# Altium PCB MAGI'sCore-bak.PcbDoc
Units mil, origin at the board's own origin, x right, y up, seen from the top; angles counter-clockwise.
Board outline 6000 x 4000 mil, 2 copper layers (Top Layer, Bottom Layer); 13 components, 31 nets, 79 pads, 12 vias.
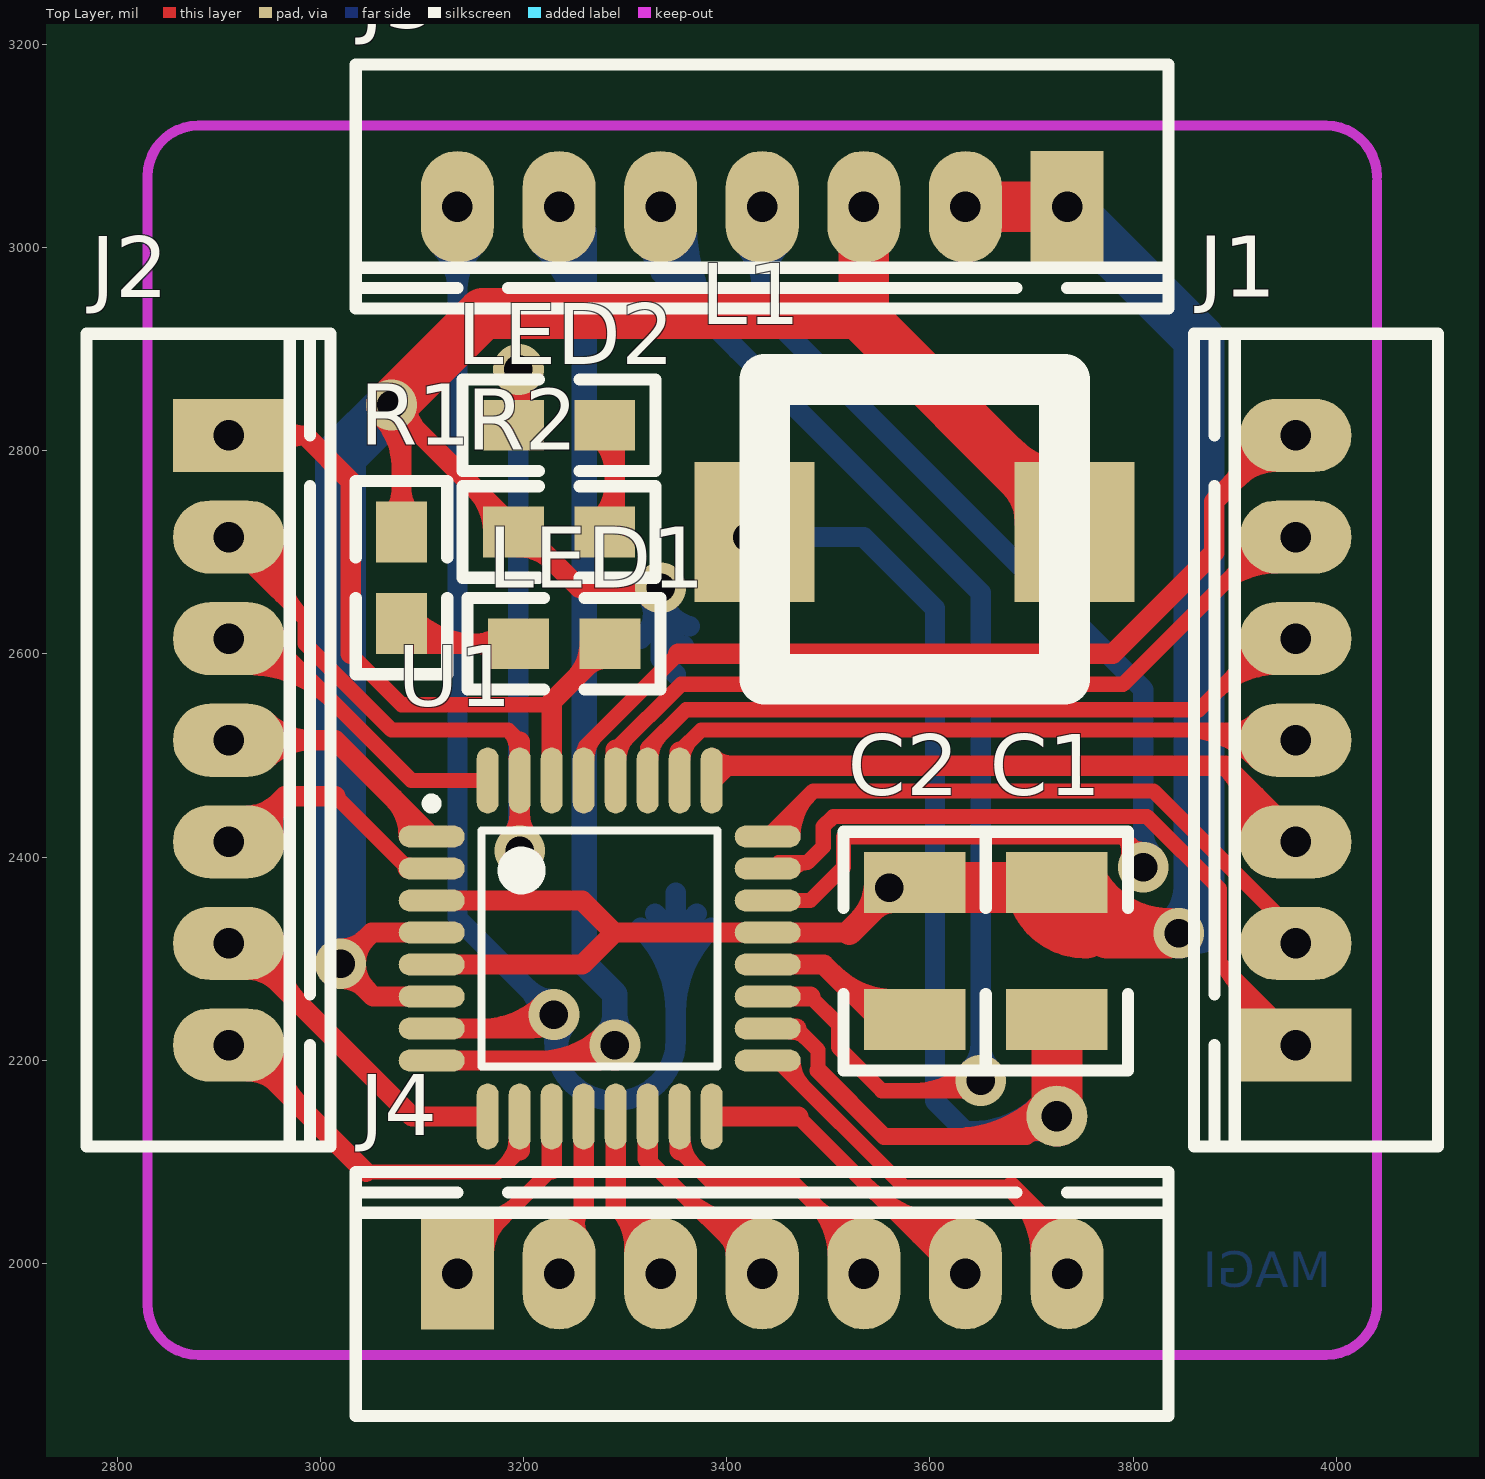
[diagram p0: Top Layer view]
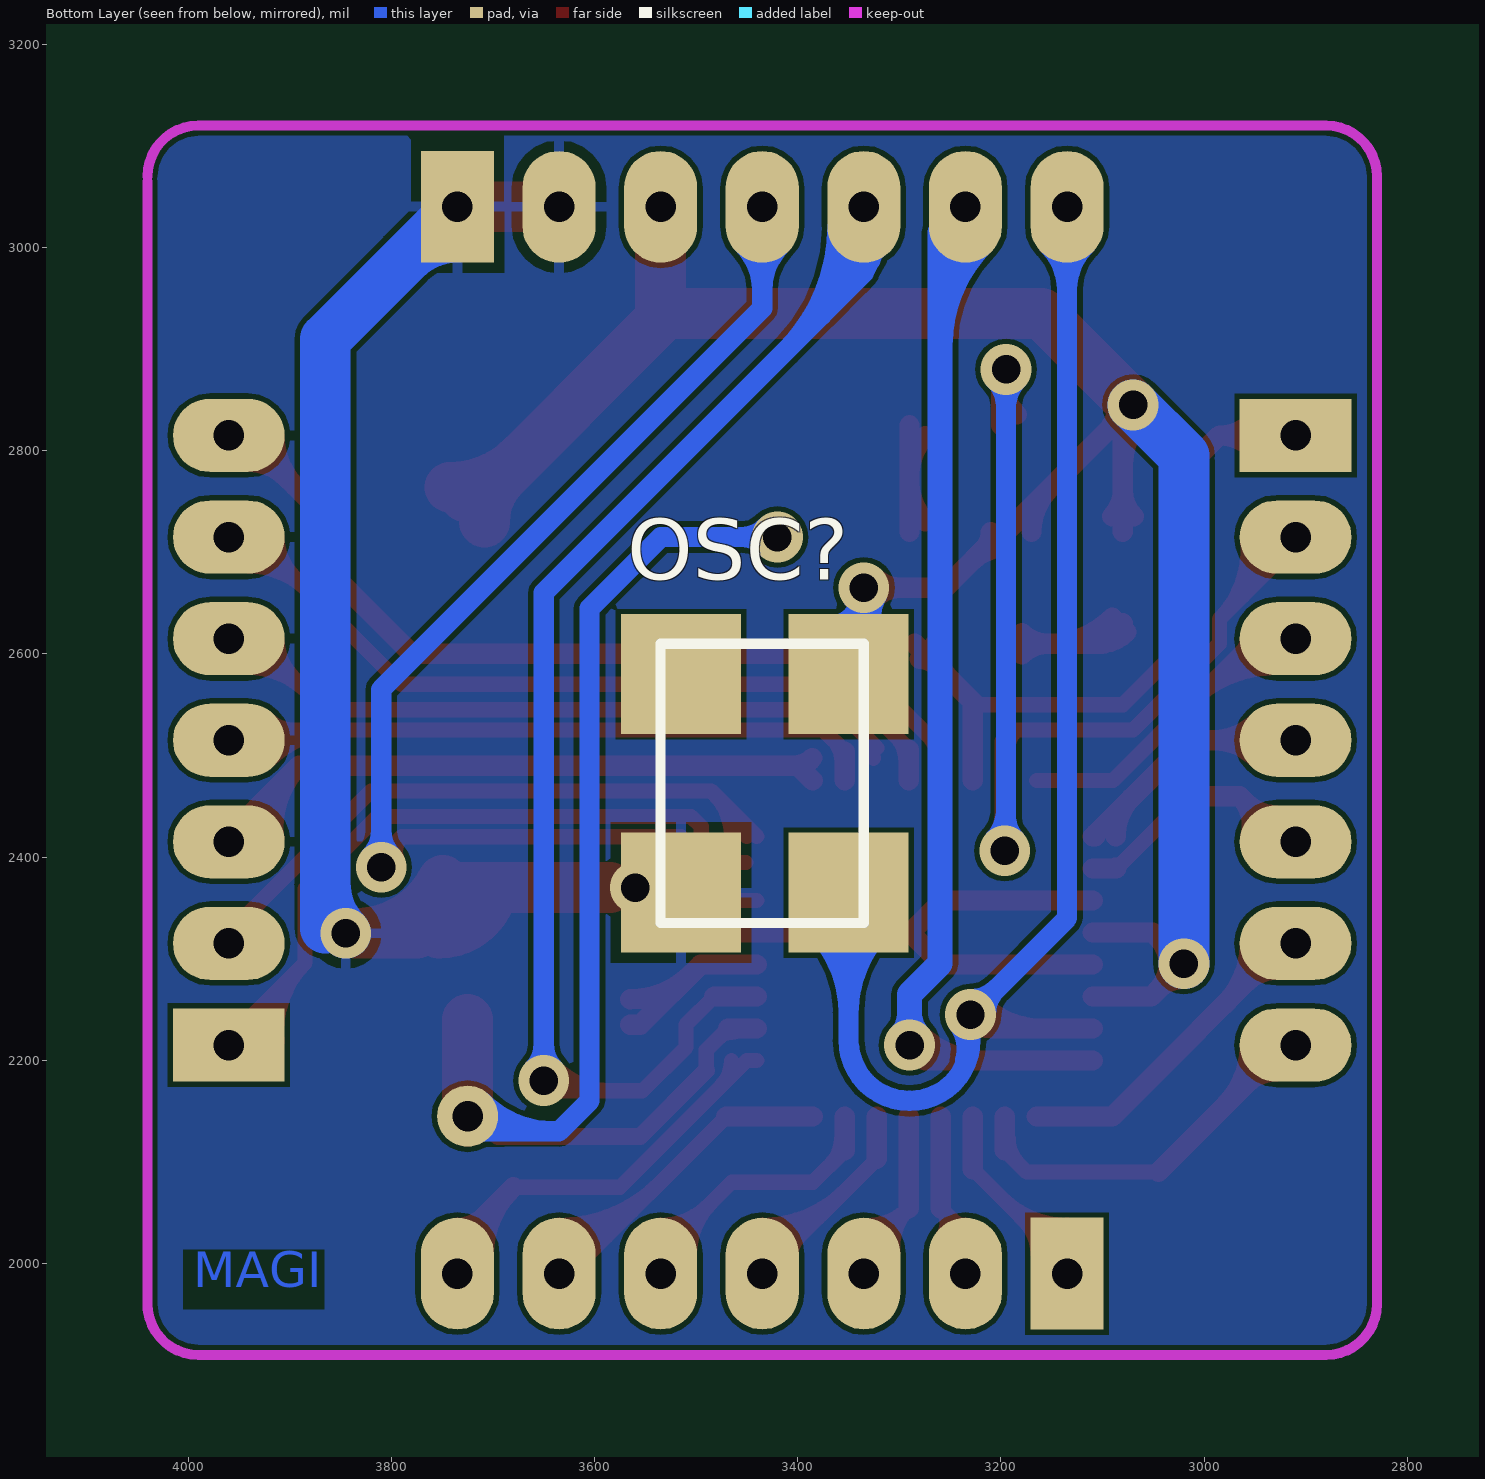
[diagram p1: Bottom Layer view, seen from below]

## Layer stack, top to bottom
Top Layer: signal copper 1.4
Dielectric: dielectric 12.6, FR-4, Dk 4.8
Bottom Layer: signal copper 1.4

## Board outline
1000,1000 7000,1000 7000,5000 1000,5000

## Design rules (kind name [scope] priority, off if disabled: settings)
Clearance [All] p1: gap=5
ComponentClearance [All] p1: gap=0 collisioncheckmode=3 verticalgap=0 showdistances=FALSE
PolygonConnect [All] p1: connectstyle=Relief reliefconductorwidth=10 reliefentries=4 polygonreliefangle="90 Angle" airgapwidth=10
RoutingVias [All] p1: holewidth=28 width=50 viastyle="Through Hole" minholewidth=28 minwidth=50 maxholewidth=28 maxwidth=50
SilkToSilkClearance [All] p1: silktosilkclearance=0
SolderMaskExpansion [All] p1: expansion=4
Width [All] p1: maxlimit=100 minlimit=10 preferedwidth=10
26 further rules are at their usual default settings.

## Components (designator, comment, footprint, x,y, rotation, side; value= is the part's Value field where it differs from the comment)
C1 "CAP_1" 1210 3725,2375 r270 top
C2 "CAP_1" 1210 3585,2375 r270 top
J1 "CON7" CON7 3960,2215 r90 top
J2 "CON7" CON7 2910,2815 r270 top
J3 "CON7" CON7 3735,3040 r180 top
J4 "CON7" CON7 3135,1990 r0 top
L1 "INDUCTOR" 22uh 3585,2720 r0 top
LED1 "LED_3" 0805 3195,2610 r0 top
LED2 "LED_3" 0805 3280,2825 r180 top
OSC? "Oscillator" Oscillator 3410,2460 r270 bottom
R1 "RES1_1" 0805 3080,2630 r90 top
R2 "RES1_1" 0805 3280,2720 r180 top
U1 "ATmega8A-AU" 32A_N 3275,2310 r0 top

## Footprints (in the part's own frame and the unit in brackets; to place one, negate y for a bottom-side part, rotate by r counter-clockwise, add the part's x,y. Pads: shape width x height; smd on the part's side, far side on the other; paste and mask are expansions set on the pad)
22uh [mm]
  rect 3x3.5 smd: 1(-4,0) 2(4,0)
  silkscreen extent -3.75,-3.68 3.75,3.81
32A_N [mm] "32-Pin Thin Quad Flat Pack 0.8 mm Pitch, IPC Medium Density"
  oval 1.65x0.55 smd: 1(-4.2,2.8) 2(-4.2,2) 3(-4.2,1.2) 4(-4.2,0.4) 5(-4.2,-0.4) 6(-4.2,-1.2) 7(-4.2,-2) 8(-4.2,-2.8) 17(4.2,-2.8) 18(4.2,-2) 19(4.2,-1.2) 20(4.2,-0.4) 21(4.2,0.4) 22(4.2,1.2) 23(4.2,2) 24(4.2,2.8)
  oval 0.55x1.65 smd: 9(-2.8,-4.2) 10(-2,-4.2) 11(-1.2,-4.2) 12(-0.4,-4.2) 13(0.4,-4.2) 14(1.2,-4.2) 15(2,-4.2) 16(2.8,-4.2) 25(2.8,4.2) 26(2,4.2) 27(1.2,4.2) 28(0.4,4.2) 29(-0.4,4.2) 30(-1.2,4.2) 31(-2,4.2) 32(-2.8,4.2)
  silkscreen extent -4.32,-2.95 2.95,3.75, body extent -3.5,-3.5 3.5,3.5, height 1.2
0805 [mil]
  rect 60x50 smd: 1(0,0) 2(90,0)
  silkscreen extent -50,-45 140,45
1210 [mil]
  rect 60x100 smd: 1(0,0) 2(135,0)
  silkscreen extent -50,-70 185,70
CON7 [mil]
  rect 72x110 hole 30: 1(0,0)
  oval 72x110 hole 30: 2(100,0) 3(200,0) 4(300,0) 5(400,0) 6(500,0) 7(600,0)
  silkscreen extent -100,-140 700,100
Oscillator [mil] "7mm*5mm"
  rect 118.11x118.11 smd: 1(-120,-105) 2(95,-105) 3(95,60) 4(-120,60)
  silkscreen extent -150,-125 125,75

## Part data
C1 C2: "Capacitor"
J1 J2 J3 J4: "Connector"
U1: "8-bit AVR Microcontroller, 8KB Flash, 512 Bytes EEPROM, 1KB SRAM, 32-pin TQFP, Industrial Grade (-40癈 to 85癈)"

## Free pads (board coordinates)
  round 60 hole 30: 0(3725,2145)

## Via types
v1: diameter 50, hole 28, Top Layer to Bottom Layer, 12 vias

## Nets (pads, with @x,y where several pads share a name; then routed paths per layer and width w, separated by ;. In a path a pad name is that pad's centre, name@x,y a point inside that pad or via, vN(x,y) a via of type N, cw(c..) or ccw(c..) an arc to the next point about the centre after c; other vN are vias at no path point)
ADC6: J3.5 U1.19 | length 1734.9
  Top Layer w15: 3482.24,2262.76 3510,2235 3510,2212.72 3552.72,2170 3645,2170 v1@3650,2175 ; 3583.61,2170 ccw(c3583.61,2246.39) v1@3637.63,2192.37 ; 3619.82,2170 ccw(c3619.82,2210.18) v1@3648.23,2181.77
  Top Layer w20: U1.19 3482.24,2262.76
  Bottom Layer w20: J3.5@3321,3021 ccw(c3398.25,3021) 3343.63,2966.37 ; J3.5@3321.59,2998.72 cw(c3307.31,2975) 3335,2975 ; J3.5 3335,2975 ; J3.5@3341,3021 ccw(c3466.54,3021) 3377.77,2932.23 ; J3.5@3348.41,2998.72 ccw(c3362.69,2975) 3335,2975 ; J3.5@3361,3021 ccw(c3534.82,3021) 3411.91,2898.09 ; v1@3639.39,2190.61 ccw(c3613.79,2216.21) 3650,2216.21 ccw(c3686.21,2216.21) v1@3660.61,2190.61 ; v1@3650,2200 3650,2660 3335,2975
  other v1: 3650,2180
ADC7: J3.4 U1.22 | length 1471.1
  Top Layer w15: U1.22 3482.24,2357.24 3515,2390 3515,2420 3790,2420 ; v1@3794.09,2397.28 ccw(c3775.7,2405.7) 3790,2420 ; 3797.2,2412.8 ccw(c3810,2425.61) v1@3810,2407.5 ; v1(3810,2390) 3810,2380 3810,2400 3790,2420
  Bottom Layer w20: J3.4@3416.62,3002.62 cw(c3372.23,2958.23) 3435,2958.23 cw(c3497.77,2958.23) J3.4@3453.38,3002.62 ; J3.4 3435,2940 3810,2565 3810,2380 v1(3810,2390) ; v1@3799.39,2400.61 ccw(c3773.79,2426.21) 3810,2426.21 ccw(c3846.21,2426.21) v1@3820.61,2400.61
GND: C1.1 C2.1 J3.1 J3.2 OSC?.2 U1.3 U1.5 U1.21 | length 2254.3
  Top Layer w20: U1.5 3257.76,2294.25 3289.25,2325.75 ; U1.3 3257.76,2357.24 3289.25,2325.75 ; 3520.75,2325.75 U1.21 3289.25,2325.75
  Top Layer w25: 3520.75,2325.75 C2.1@3565,2370 ; 3531.59,2336.59 ccw(c3493.18,2375) C2.1@3547.5,2375 ; 3535.13,2340.13 ccw(c3505.25,2370) C2.1@3547.5,2370 ; C2.1@3543.66,2348.66 cw(c3565,2327.32) C2.1@3565,2357.5
  Top Layer w30: C2.1@3565,2370 C2.1@3585,2370
  Top Layer w50: C2.1@3585,2370 3730,2370 3775,2325 3835,2325 cw(c3835,2421.13) C1.1@3749.45,2377.28 ; J3.2 J3.1 ; C1.1@3704.95,2354.47 ccw(c3753.18,2379.19) 3753.18,2325 ; C1.1@3750,2375 ccw(c3810.36,2375) 3767.68,2332.32
  Bottom Layer w50: J3.1@3735,3010 cw(c3735,2937.57) 3786.21,2988.79 ; J3.1 3865,2910 v1@3865,2330 ; v1(3845,2325) ccw(c3796.72,2373.28) 3865,2373.28
  other v1: 3560,2370
MISO: J4.6 U1.16 | length 555.6
  Top Layer w15: 3470.35,2144.65 J4.6@3625,1990 ; 3536.84,2078.16 ccw(c3635,2176.32) J4.6@3635,2037.5 ; 3562.45,2052.55 ccw(c3635,2125.1) J4.6@3635,2022.5 ; 3588.05,2026.95 ccw(c3635,2073.89) J4.6@3635,2007.5
  Top Layer w20: U1.16 3470.35,2144.65 ; J4.6@3625,1990 J4.6
MOSI: J4.5 U1.15 | length 413.2
  Top Layer w15: 3353.74,2111.26 3385,2080 3465,2080 J4.5@3535,2010 ; U1.15@3357.07,2122.99 ccw(c3393.42,2122.99) 3367.72,2097.28 ; 3485.64,2059.36 cw(c3435.28,2009) J4.5@3506.5,2009 ; 3488.05,2056.95 ccw(c3535,2103.89) J4.5@3535,2037.5
  Top Layer w20: 3353.74,2111.26 U1.15 ; J4.5 J4.5@3535,2010
NetC1_2: C1.2 L1.1 pad.0 U1.18 | length 1661.8
  Top Layer w15: U1.18@3462.01,2227.93 cw(c3462.01,2203.65) 3479.18,2220.82 ; U1.18@3468.74,2231.26 3490,2210 3490,2190
  Top Layer w17: 3490,2190 3555,2125 3695,2125 ; 3624.81,2125 ccw(c3624.81,2245.19) pad.0@3709.8,2160.2 ; 3665.85,2125 ccw(c3665.85,2204.15) pad.0@3721.82,2148.18 ; 3695.37,2125.37 ccw(c3675.74,2145) pad.0@3703.5,2145 ; pad.0@3713.33,2126.95 ccw(c3705.37,2114.64) 3695,2125 ; pad.0@3725,2155 3695,2125
  Top Layer w20: U1.18 U1.18@3468.74,2231.26
  Top Layer w50: pad.0@3725,2140 pad.0 ; pad.0@3725,2155 C1.2
  Bottom Layer w20: v1(3420,2715) 3535,2715 3605,2645 3605,2160 3635,2130 pad.0@3720,2130 ; v1@3430.61,2704.39 cw(c3456.21,2678.79) 3456.21,2715 cw(c3456.21,2751.21) v1@3430.61,2725.61 ; 3640.5,2130 ccw(c3640.5,2229.5) pad.0@3710.86,2159.14 ; 3688.79,2130 ccw(c3688.79,2181.21) pad.0
NetC2_2: C2.2 U1.20 | length 215.6
  Top Layer w20: U1.20 3495.75,2294.25 3555,2235 C2.2@3565,2235 ; 3505.25,2284.75 ccw(c3565,2344.5) C2.2@3565,2260
NetJ1_1: J1.1 U1.23 | length 915.9
  Top Layer w15: U1.23@3451.02,2394.57 3479.57,2394.57 ; U1.23@3464.73,2386.84 cw(c3479.57,2376.48) 3479.57,2394.57 ; 3907.26,2273.68 cw(c3857.31,2223.73) J1.1@3927.57,2216.4 ; J1.1@3912.65,2217.96 ccw(c3816.99,2227.93) 3885,2295.94 ; 3929.52,2251.42 cw(c3897.62,2219.52) J1.1@3942.49,2214.84 ; J1.1@3975,2190 3975,2205.95 3885,2295.95 ; 3479.57,2394.57 3495,2410 3495,2430 3505,2440 3813.79,2440 3885,2368.79 3885,2295.95
NetJ1_2: J1.2 U1.24 | length 703.7
  Top Layer w15: U1.24 3485.12,2465 3820,2465 3975,2310 J1.2@3975,2290 ; U1.24@3450.33,2420.24 cw(c3474.43,2420.24) 3457.39,2437.27 ; U1.24@3465.33,2420.24 cw(c3525.64,2420.24) 3483,2462.88
NetJ1_3: J1.3 U1.25 | length 811.6
  Top Layer w20: U1.25 3399.88,2490 ; U1.25@3385.82,2497.59 ccw(c3404.15,2515.92) 3404.15,2490 ; U1.25@3385.92,2497.47 ccw(c3399.88,2506.78) 3399.88,2490 ; J1.3@3915.22,2418.41 ccw(c3830.56,2429.61) 3890.95,2490 ; 3919.6,2461.34 cw(c3881.18,2422.91) J1.3@3935.05,2415.79 ; J1.3@3975,2390 3975,2405.95 3890.95,2490 ; 3399.88,2490 3890.95,2490
NetJ1_4: J1.4 U1.26 | length 852.5
  Top Layer w15: U1.26@3353.74,2503.74 3375,2525 J1.4@3940,2525 ; U1.26@3357.07,2497.01 cw(c3381.35,2497.01) 3364.18,2514.18 ; 3848.05,2525 cw(c3848.05,2422.05) J1.4@3920.85,2494.85 ; 3884.27,2525 cw(c3884.27,2458.27) J1.4@3931.45,2505.45 ; 3896.34,2525 ccw(c3896.34,2559.66) J1.4@3920.85,2535.15
  Top Layer w20: U1.26 U1.26@3353.74,2503.74 ; J1.4@3940,2525 J1.4@3975,2490
NetJ1_5: J1.5 U1.27 | length 891.7
  Top Layer w15: U1.27@3322.24,2507.24 3360,2545 3865,2545 3910,2590 ; U1.27@3325.57,2497.01 cw(c3358.31,2497.01) 3335.16,2520.16 ; 3882.1,2562.1 cw(c3941,2503.21) J1.5@3941,2586.5 ; 3896.59,2576.59 ccw(c3858.18,2615) J1.5@3912.5,2615 ; 3907.71,2587.71 cw(c3941,2554.42) J1.5@3941,2601.5 ; J1.5@3913.89,2606.2 cw(c3898.72,2601.28) 3910,2590 ; J1.5@3924.99,2591.42 ccw(c3918.35,2581.65) 3910,2590
  Top Layer w20: 3910,2590 J1.5@3975,2590
NetJ1_6: J1.6 U1.28 | length 992.8
  Top Layer w15: U1.28@3290.75,2505.75 3355,2570 3790,2570 3910,2690 ; U1.28@3294.07,2497.01 cw(c3323.21,2497.01) 3302.61,2517.61 ; 3882.1,2662.1 cw(c3941,2603.21) J1.6@3941,2686.5 ; 3896.59,2676.59 ccw(c3858.18,2715) J1.6@3912.5,2715 ; 3907.71,2687.71 cw(c3941,2654.42) J1.6@3941,2701.5 ; J1.6@3913.89,2706.2 cw(c3898.72,2701.28) 3910,2690 ; J1.6@3924.99,2691.42 ccw(c3918.35,2681.65) 3910,2690
  Top Layer w20: U1.28 U1.28@3290.75,2505.75 ; 3910,2690 J1.6@3975,2690
NetJ2_3: J2.3 U1.32 | length 476.1
  Top Layer w15: J2.3@2929,2586.5 cw(c2929,2467) 3013.5,2551.5 ; J2.3@2929,2601.5 cw(c2929,2518.21) 2987.9,2577.1 ; J2.3@2950,2615 3089.65,2475.35 U1.32 ; J2.3@2957.5,2615 ccw(c2975.61,2615) 2962.8,2602.2
  Top Layer w20: J2.3@2920,2615 J2.3@2950,2615
NetJ2_4: J2.4 U1.1 | length 374.8
  Top Layer w20: J2.4@2920,2515 3014.88,2515 U1.1 ; J2.4@2947.38,2496.62 cw(c2991.77,2452.23) 2991.77,2515 cw(c2991.77,2577.77) J2.4@2947.38,2533.38 ; 3071.27,2458.61 cw(c3032.89,2420.24) U1.1@3087.17,2420.24 ; U1.1@3105.41,2424.47 cw(c3101.18,2420.24) U1.1@3107.17,2420.24
NetJ2_5: J2.5 U1.2 | length 321.7
  Top Layer w15: 3015,2460 U1.2@3086.26,2388.74 ; 3079.36,2395.64 ccw(c3087.99,2404.28) U1.2@3087.99,2392.07
  Top Layer w20: J2.5@2920,2415 2965,2460 ; J2.5@2929,2441 ccw(c2929,2482.04) 2958.02,2453.02 ; J2.5@2954.23,2421.26 cw(c2993.89,2431.11) 2965,2460 ; 3015,2460 2965,2460 ; U1.2@3086.26,2388.74 U1.2
NetJ2_6: J2.6 U1.9 | length 413.9
  Top Layer w20: J2.6@2920,2315 3090.35,2144.65 U1.9 ; J2.6@2929,2289 cw(c2929,2247.96) 2958.02,2276.98 ; J2.6@2955,2315 ccw(c3039.5,2315) 2979.75,2255.25
NetJ2_7: J2.7 U1.10 | length 497.4
  Top Layer w15: 3045,2090 3175,2090 3196.26,2111.26 ; 3182.28,2097.28 ccw(c3156.58,2122.99) U1.10@3192.93,2122.99
  Top Layer w20: J2.7@2920,2215 3045,2090 ; J2.7@2929,2189 cw(c2929,2147.96) 2958.02,2176.98 ; J2.7@2955,2215 ccw(c3039.5,2215) 2979.75,2155.25 ; 3196.26,2111.26 U1.10
NetJ4_1: J4.1 U1.11 | length 343.8
  Top Layer w15: J4.1@3135,2000 3227.76,2092.76 ; J4.1@3135,2022.5 ccw(c3135,2076.82) 3173.41,2038.41 ; J4.1@3135,2037.5 ccw(c3135,2128.03) 3199.02,2064.02 ; J4.1@3163.5,2009 cw(c3210.58,2009) 3177.29,2042.29
  Top Layer w20: J4.1 J4.1@3135,2000 ; 3227.76,2092.76 U1.11
NetJ4_2: J4.2 U1.12 | length 209.3
  Top Layer w15: J4.2 3235,2030 3259.25,2054.25 ccw(c3274.12,2039.38) J4.2@3257.51,2026.48 ; J4.2@3235,2037.5 ccw(c3235,2055.61) 3247.8,2042.8
  Top Layer w20: 3259.25,2054.25 U1.12
NetJ4_3: J4.3 U1.13 | length 267.8
  Top Layer w15: J4.3@3306.59,2011.26 ccw(c3252.1,2015.59) 3290.75,2054.25 ; J4.3@3333.8,2037.47 cw(c3331.37,2094.87) 3290.75,2054.25 ; J4.3 3335,2010 3290.75,2054.25
  Top Layer w20: 3290.75,2054.25 U1.13
NetJ4_4: J4.4 U1.14 | length 371.1
  Top Layer w15: 3322.24,2102.76 J4.4 ; 3353.91,2071.09 ccw(c3435,2152.18) J4.4@3435,2037.5 ; 3379.52,2045.48 ccw(c3435,2100.96) J4.4@3435,2022.5 ; 3399.78,2025.22 cw(c3383.57,2009) J4.4@3406.5,2009
  Top Layer w20: 3322.24,2102.76 U1.14
NetLED1_1: LED1.1 R1.1 | length 279.6
  Top Layer w20: R1.1@3076.46,2621.46 ccw(c3104.14,2649.14) R1.1@3104.14,2610 ; R1.1 3100,2610 LED1.1 ; R1.1@3090.61,2635.61 ccw(c3152.43,2697.43) 3152.43,2610 ; LED1.1@3179.39,2599.39 ccw(c3153.79,2573.79) 3153.79,2610 ccw(c3153.79,2646.21) LED1.1@3179.39,2620.61
NetLED2_1: LED2.1 R2.1 | length 188.7
  Top Layer w20: R2.1@3274.39,2730.61 ccw(c3236.72,2768.28) 3290,2768.28 ; LED2.1@3274.39,2814.39 cw(c3236.72,2776.72) 3290,2776.72 ; R2.1@3290,2720 LED2.1@3290,2825
PB6: J3.7 OSC?.3 U1.7 | length 1910.4
  Top Layer w20: U1.7 3206.26,2231.26 ; 3160.62,2231.26 ccw(c3160.62,2314.38) v1@3219.39,2255.61 ; 3208.9,2231.26 ccw(c3208.9,2266.1) v1@3233.54,2241.46 ; v1@3221.49,2232.65 ccw(c3214.71,2222.81) 3206.26,2231.26 ; v1@3222.5,2247.5 3206.26,2231.26
  Bottom Layer w20: J3.7@3116.62,3002.62 cw(c3072.23,2958.23) 3135,2958.23 cw(c3197.77,2958.23) J3.7@3153.38,3002.62 ; J3.7 3135,2340 v1(3230,2245) 3230,2220 ccw(c3290,2220) 3290,2160 ccw(c3290,2220) 3350,2220 OSC?.3 ; v1@3215,2245 ccw(c3178.79,2245) 3204.39,2270.61 ccw(c3230,2296.21) v1@3230,2260 ; 3235.14,2200.83 cw(c3274.56,2211.39) v1@3241.98,2235.97 ; OSC?.3@3315.31,2330.31 cw(c3231.57,2246.57) 3350,2246.57 cw(c3468.43,2246.57) OSC?.3@3384.69,2330.31 ; OSC?.3@3329.45,2344.45 cw(c3279.85,2294.85) 3350,2294.85 cw(c3420.15,2294.85) OSC?.3@3370.55,2344.45
PB7: J3.6 U1.8 | length 1358.3
  Top Layer w20: U1.8 3274.76,2199.76 v1(3290,2215) ; 3217,2199.76 ccw(c3217,2288) v1@3279.39,2225.61 ; 3265.29,2199.76 ccw(c3265.29,2239.71) v1@3293.54,2211.46
  Bottom Layer w25: J3.6@3218.38,3004.38 cw(c3117.91,2903.91) 3260,2903.91 ; J3.6 3260,3015 3260,2295 3290,2265 v1(3290,2215) ; J3.6@3236.06,3022.06 cw(c3178.27,2964.27) 3260,2964.27 ; v1@3281.16,2223.84 ccw(c3259.82,2245.18) 3290,2245.18 ccw(c3320.18,2245.18) v1@3298.84,2223.84
RST: J1.7 U1.29 | length 1025.8
  Top Layer w10: U1.29 U1.29@3259.25,2507.09
  Top Layer w15: U1.29@3261.77,2499.18 cw(c3267.79,2504.38) 3262.17,2510 3352.17,2600 ; U1.29@3262.58,2497.01 cw(c3294.94,2497.01) 3272.06,2519.89
  Top Layer w20: 3352.17,2600 3780,2600 3880,2700 3880,2750 3920,2790 J1.7@3975,2790 ; 3893.79,2763.79 ccw(c3842.57,2815) J1.7@3915,2815 ; 3903.44,2773.44 cw(c3941,2735.89) J1.7@3941,2789
RXD: J2.1 LED1.2 U1.30 | length 889.2
  Top Layer w15: 3030,2600 3080,2550 3227.76,2550
  Top Layer w20: J2.1@2920,2815 2985,2815 ; J2.1@2948.86,2798.22 cw(c2985,2767.7) 2985,2815 ; J2.1@2948.86,2831.78 ccw(c2985,2862.3) 2985,2815 ; 3030,2600 3030,2770 2985,2815 ; 3227.76,2550 U1.30 3227.76,2552.76 LED1.2 ; 3250.86,2575.86 ccw(c3216.72,2610) LED1.2@3265,2610 ; LED1.2@3262.93,2587.93 cw(c3280,2570.86) LED1.2@3280,2595
SCK: J4.7 U1.17 | length 526.5
  Top Layer w15: U1.17 3450.24,2199.76 3575,2075 3680,2075 ; U1.17@3450.33,2199.76 ccw(c3450.57,2199.76) U1.17@3450.4,2199.6 ; U1.17@3465.33,2199.76 ccw(c3501.78,2199.76) 3476.01,2173.99
  Top Layer w20: 3680,2075 3735,2020 J4.7 ; 3682.84,2072.16 cw(c3619.67,2009) J4.7@3709,2009 ; 3709.39,2045.61 ccw(c3735,2071.21) J4.7@3735,2035
TXD: J2.2 LED2.2 U1.31 | length 1461.4
  Top Layer w15: J2.2@2927.51,2715.16 ccw(c2972.38,2710.48) 2940.48,2678.58 ; J2.2@2932.03,2687.03 2985,2634.05 ; J2.2@2942.43,2713.6 ccw(c3012.69,2706.27) 2962.74,2656.32 ; J2.2@2957.35,2712.04 ccw(c3053.01,2702.07) 2985,2634.06 ; U1.31@3193.01,2497.72 ccw(c3164.03,2504.03) 3185,2525 ; 3196.26,2513.74 3185,2525 ; 2985,2634.05 2985,2610 3070,2525 3185,2525
  Top Layer w20: LED2.2@3184.39,2835.61 ccw(c3146.72,2873.28) v1@3200,2873.28 ; v1@3184.39,2869.39 cw(c3146.72,2831.72) LED2.2@3200,2831.72 ; v1@3185.65,2416.87 ccw(c3160.05,2442.47) 3196.26,2442.47 ccw(c3232.47,2442.47) v1@3206.87,2416.87 ; v1(3195,2880) 3200,2875 LED2.2@3200,2825 ; v1(3196.26,2406.26) U1.31 3196.26,2513.74
  Bottom Layer w20: v1@3184.39,2869.39 cw(c3158.79,2843.79) 3195,2843.79 cw(c3231.21,2843.79) v1@3205.61,2869.39 ; v1@3185.65,2416.87 ccw(c3163.09,2439.43) 3195,2439.43 ; 3195,2445.52 ccw(c3235.52,2445.52) v1@3206.87,2416.87 ; v1(3195,2880) 3195,2407.52 v1(3196.26,2406.26)
VCC: J3.3 L1.2 OSC?.4 R1.2 R2.2 U1.4 U1.6 | length 3023.6
  Top Layer w20: v1@3020,2280 cw(c3020,2243.79) 3045.61,2269.39 cw(c3071.21,2295) 3035,2295 cw(c3071.21,2295) 3045.61,2320.61 cw(c3020,2346.21) v1@3020,2310 ; v1@3059.39,2834.39 cw(c3009.64,2784.64) 3080,2784.64 ; R1.2@3069.39,2735.61 ccw(c3043.79,2761.21) 3080,2761.21 ccw(c3116.21,2761.21) R1.2@3090.61,2735.61 ; v1@3070,2830 cw(c3070,2793.79) 3095.61,2819.39 cw(c3121.21,2845) v1@3085,2845 ; v1(3070,2845) v1@3080,2835 ; R1.2 v1@3080,2835 ; U1.6 3052.24,2262.76 v1(3020,2295) 3050.75,2325.75 U1.4 ; 3152.32,2762.68 cw(c3109.64,2720) R2.2@3170,2720 ; R2.2@3195,2705 cw(c3195,2656.72) 3229.14,2690.86 ; R2.2@3210,2720 ccw(c3234.14,2720) R2.2@3217.07,2702.93 ; v1@3324.39,2654.39 ccw(c3298.79,2628.79) 3298.79,2665 ccw(c3298.79,2701.21) v1@3324.39,2675.61 ; v1(3335,2665) 3255,2665 3200,2720 3195,2720 v1@3080,2835
  Top Layer w50: v1(3070,2845) 3160,2935 3535,2935 ; J3.3 3535,2930 3710,2755 L1.2@3727.5,2755 ; 3671.83,2793.17 ccw(c3742.5,2863.84) L1.2@3742.5,2763.9 ; L1.2@3689.56,2775.44 cw(c3643.95,2729.84) L1.2@3708.44,2729.84
  Bottom Layer w20: OSC?.4@3315.31,2614.69 ccw(c3267.78,2662.22) v1@3335,2662.22 ; v1@3322.27,2657.07 cw(c3292.88,2638.77) OSC?.4@3326.32,2629.82 ; v1@3324.39,2654.39 cw(c3298.79,2628.79) 3335,2628.79 cw(c3371.21,2628.79) v1@3345.61,2654.39 ; OSC?.4@3326.77,2631.51 cw(c3359.38,2622.78) v1@3342.5,2652.01 ; OSC?.4@3335,2638.46 ccw(c3366.76,2638.46) OSC?.4@3358.01,2607.93 ; OSC?.4 3335,2595 v1(3335,2665) ccw(c3374.37,2665) OSC?.4@3363.52,2627.16
  Bottom Layer w50: v1(3020,2295) 3020,2790 ; 3020,2795 v1(3070,2845)
pads on no net: OSC?.1

## Polygon pours and split planes (outlines as drawn)
GND on Bottom Layer "Keep-Out Layer-No Net" (solid, pour order 3): 2825,3125 2825,1905 4045,1905 4045,3125

## Keep-outs
Keep-Out Layer:
  lines w10: 4040,1955 4040,3065 ; 4040,1960 cw(c3990,1960) 3990,1910 2880,1910 cw(c2880,1960) 2830,1960 2830,2805 2830,3070 cw(c2880,3070) 2880,3120 3990,3120 cw(c3990,3070) 4040,3070

## Other copper
Bottom Layer:
  text "MAGI" at 3995,1965 h60

## Silkscreen, mask and mechanical layers (free items; w line width, h text height)
Mechanical 1:
  lines w10: 2830,1960 ccw(c2880,1960) 2880,1910 3990,1910 ccw(c3990,1960) 4040,1960 4040,3070 ccw(c3990,3070) 3990,3120 2880,3120 ccw(c2880,3070) 2830,3070 2830,2805 2830,1960